# Altium PCB Solar_Wifi.PcbDoc
Units mm, origin at the board's own origin, x right, y up, seen from the top; angles counter-clockwise.
Board outline 128.5 x 66.5 mm, 2 copper layers (Top Layer, Bottm Layer); 44 components, 28 nets, 108 pads, 0 vias.
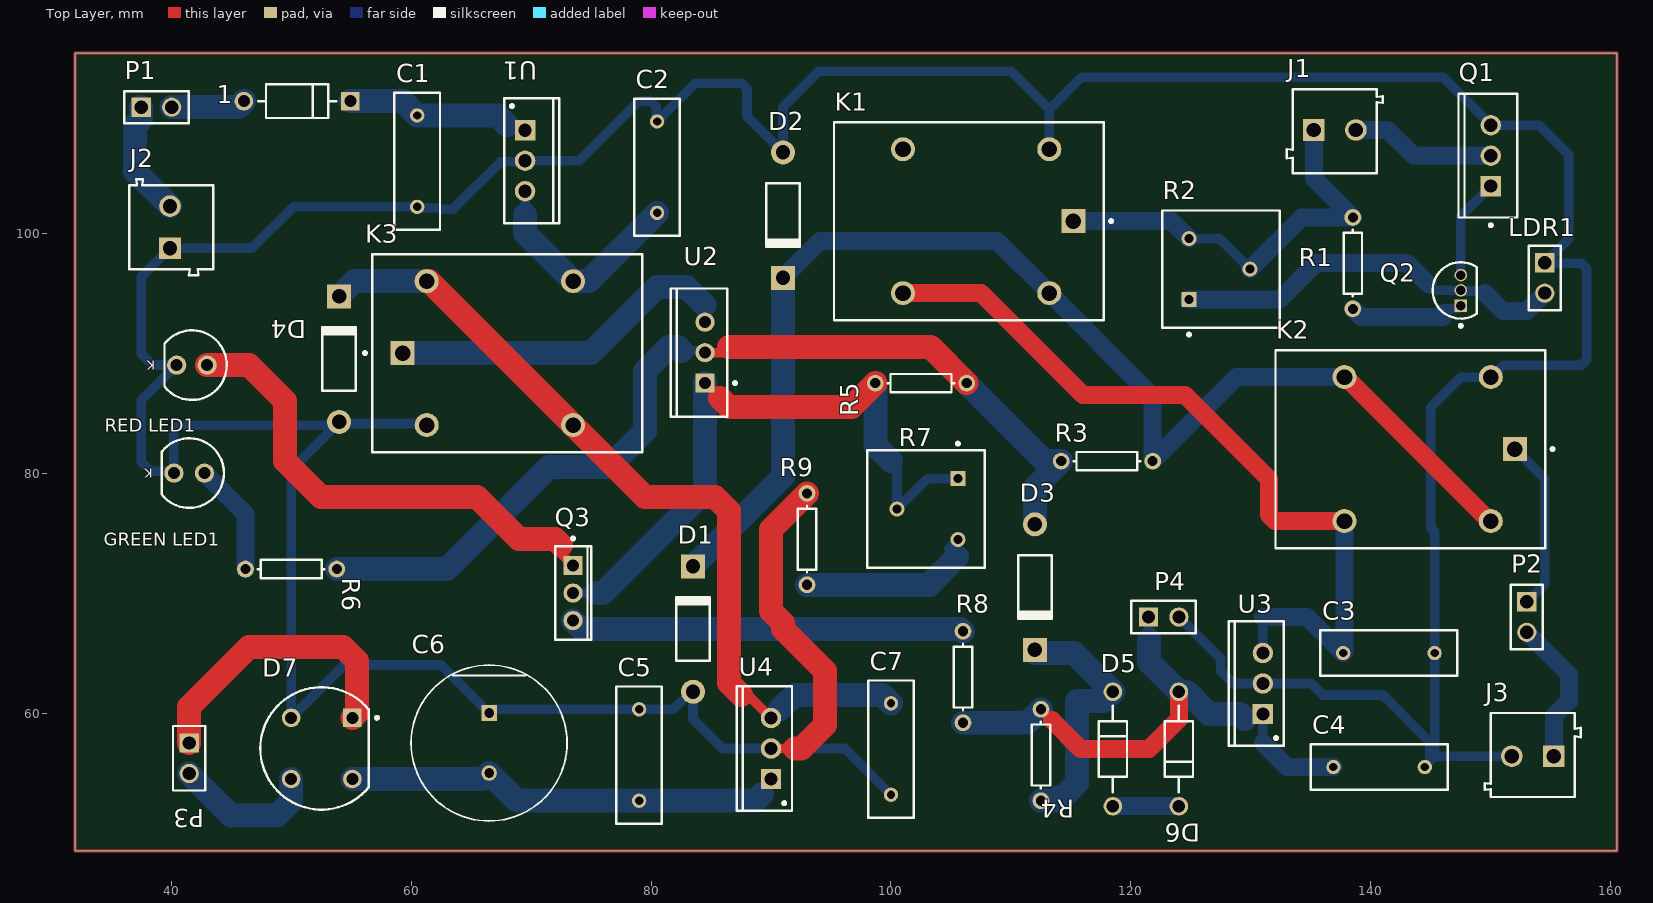
[diagram p0: Top Layer view]
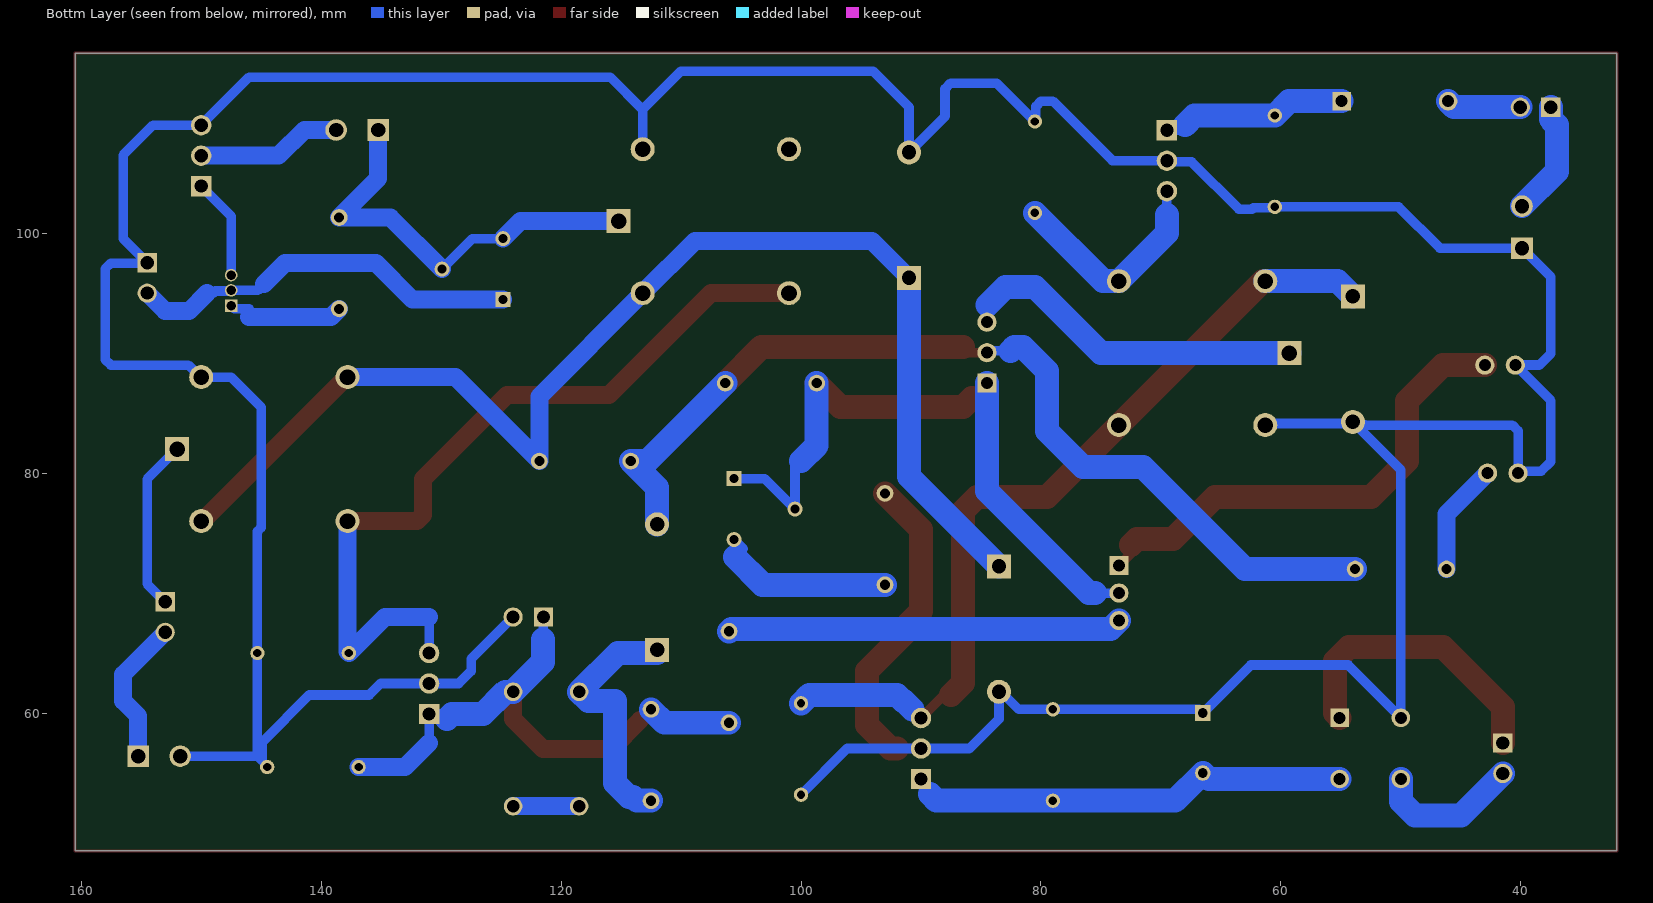
[diagram p1: Bottm Layer view, seen from below]

## Layer stack, top to bottom
Top Solder: solder mask 0.0102, Solder Resist, Dk 3.5
Top Layer: signal copper 0.0356
Dielectric 1: dielectric 0.32, FR-4, Dk 4.8
Bottm Layer: signal copper 0.0356
Bottom Solder: solder mask 0.0102, Solder Resist, Dk 3.5

## Board outline
32,48.5 32,115 160.5,115 160.5,48.5

## Design rules (kind name [scope] priority, off if disabled: settings)
Clearance Clearance_4 [All] p1: gap=0.254 ignorepadtopadclearanceinfootprint=FALSE except(0: Arc-Hole Track-Hole SMDPad-Hole THPad-Hole Via-Hole Fill-Hole Poly-Hole Region-Hole Text-Hole)
Clearance Clearance_3 [All] p2: gap=0.254 ignorepadtopadclearanceinfootprint=FALSE except(0: Arc-Hole Track-Hole SMDPad-Hole THPad-Hole Via-Hole Fill-Hole Poly-Hole Region-Hole Text-Hole)
Clearance Clearance_2 [All] p3: gap=0.254 ignorepadtopadclearanceinfootprint=FALSE except(0: Arc-Hole Track-Hole SMDPad-Hole THPad-Hole Via-Hole Fill-Hole Poly-Hole Region-Hole Text-Hole; 0.75: Arc-Arc Arc-Track Track-Track)
Clearance Clearance_1 [All] p4: gap=0.254 ignorepadtopadclearanceinfootprint=FALSE except(0: Arc-Hole Track-Hole SMDPad-Hole THPad-Hole Via-Hole Fill-Hole Poly-Hole Region-Hole Text-Hole; 0.75: Arc-Arc Arc-Track Track-Track)
Clearance [All] p5: gap=0.254 ignorepadtopadclearanceinfootprint=FALSE except(0: Arc-Hole Track-Hole SMDPad-Hole THPad-Hole Via-Hole Fill-Hole Poly-Hole Region-Hole Text-Hole; 0.75: Arc-Arc Arc-Track Track-Track)
PolygonConnect [All] p1: connectstyle=Relief reliefconductorwidth=0.254 reliefentries=4 polygonreliefangle="90 Angle" airgapwidth=0.254
RoutingVias [All] p1: holewidth=0.711 width=1.27 viastyle="Through Hole" minholewidth=0.711 minwidth=1.27 maxholewidth=0.711 maxwidth=1.27
SolderMaskExpansion [All] p1: expansion=0.102 istentingtop=FALSE
Width [All] p1: maxlimit=2 minlimit=0.8 preferedwidth=1.5 minimp=50.000000 maximp=50.000000 favimp=50.000000
Width Width_1 [All] p2: maxlimit=2 minlimit=0.8 preferedwidth=2 bottomlayer_minwidth=1 minimp=50.000000 maximp=50.000000 favimp=50.000000
30 further rules are at their usual default settings.

## Components (designator, comment, footprint, x,y, rotation, side; value= is the part's Value field where it differs from the comment)
1 "1N4007" FP-1N4007-MFG 50.5,111 r180 top value=15pF
C1 "Cap" RAD-0.3 60.5,106 r90 top value=0.33uf
C2 "Cap" RAD-0.3 80.5,105.5 r270 top value=0.11uf
C3 "Cap" RAD-0.3 141.5,65 r0 top value=0.11uf
C4 "Cap" RAD-0.3 140.69,55.5 r0 top value=0.33uf
C5 "Cap" RAD-0.3 79,56.5 r90 top value=0.33uf
C6 "22000uf" FP-RAD-TH-D_12_5_0_5-L_20-MFG 66.5,57.5 r270 top
C7 "Cap" RAD-0.3 100,57 r90 top value=0.11uf
D1 "Diode 1N4007" DO-41 83.5,67 r90 top
D2 "Diode 1N4007" DO-41 91,101.5 r270 top
D3 "Diode 1N4007" DO-41 112,70.5 r270 top
D4 "Diode 1N4007" DO-41 54,89.5 r90 top
D5 "1N5921BRLG" ONSC-AXIAL_LEAD-2-59-10_P 118.5,57 r270 top
D6 "1N5921BRLG" ONSC-AXIAL_LEAD-2-59-10_P 124,57 r90 top
D7 "Bridge  Rectifier" FP-WOG-MFG 52.04,57.05 r270 top value=20pF
"GREEN LED1" "151051VS04000" "Type 5mm" 41.5,80 r180 top
J1 "LED" 691103110002 137,108.5 r0 top
J2 "solar panel" 691103110002 40,100.5 r90 top
J3 "router" 691103110002 153.5,56.5 r180 top
K1 "G5LE-1-CF DC12" FP-G5LE-1-CF_DC12-MFG 106.5,101 r180 top
K2 "G5LE-1-CF DC12" FP-G5LE-1-CF_DC12-MFG 143.3,82 r180 top
K3 "G5LE-1-CF DC12" FP-G5LE-1-CF_DC12-MFG 68,90 r0 top
LDR1 "" 61300211121 154.5,96.27 r270 top
P1 "switch1" 61300211121 38.77,110.5 r0 top
P2 "switch2" 61300211121 153,68 r270 top
P3 "24v ac" 61300211121 41.5,56.23 r270 top
P4 "battery" 61300211121 122.73,68 r0 top
Q1 "D400" ONSC-TO-220-3-221A-09 150,106.46 r180 top
Q2 "C828" ONSC-TO-92-3-29-11 147.5,95.23 r90 top
Q3 "BD139" ONSC-TO-225-3-77-09 73.5,70 r0 top
R1 "Res1" AXIAL-0.3 138.5,97.5 r90 top value=1K
R2 "200K" FP-3386F-MFG 127.5,97 r90 top value=30kΩ
R3 "Res1" AXIAL-0.3 118,81 r0 top value=7
R4 "Res1" AXIAL-0.3 112.5,56.5 r270 top value=100
R5 "Res1" AXIAL-0.3 102.5,87.5 r0 top value=240
R6 "Res1" AXIAL-0.3 50,72 r0 top value=2.2K
R7 "1K" FP-3386F-MFG 102.925,77 r270 top value=30kΩ
R8 "Res1" AXIAL-0.3 106,63 r90 top value=1K
R9 "Res1" AXIAL-0.3 93,74.5 r270 top value=2.2K
"RED LED1" "151051RS11000" "Type 5mm" 41.73,89 r180 top
U1 "L7824CV" TO220 69.5,106.04 r270 top
U2 "LM317T" NDE0003A 84.5,90.04 r90 top
U3 "L7812CV" TO220 131,62.46 r90 top
U4 "L7824CV" TO220 90,57.04 r90 top

## Footprints (in the part's own frame and the unit in brackets; to place one, negate y for a bottom-side part, rotate by r counter-clockwise, add the part's x,y. Pads: shape width x height; smd on the part's side, far side on the other; paste and mask are expansions set on the pad)
61300211121 [mm] "Pin Header, pitch 2.54 mm, THT, Vertical, single row, 2p"
  rect 1.6x1.6 hole 1.1: 1(-1.27,0)
  round 1.6 hole 1.1: 2(1.27,0)
  silkscreen extent -2.69,-1.35 2.69,1.34, body extent -2.54,-1.27 2.54,1.27, height 8.57
691103110002 [mm] "3,50mm - modular - blue - Horizontal wire entry - Pressure clamp - 8,4mm height - 02p"
  rect 1.8x1.8 hole 1.2: 1(-1.75,0.1)
  round 1.8 hole 1.2: 2(1.75,0.1)
  silkscreen extent -4,-3.5 4,3.5, body extent -4,-3.5 4,3.5, height 8.45
AXIAL-0.3 [mm] "Axial Device, Thru-Hole; 2 Leads; 0.3 in Pin Spacing"
  round 1.4 hole 0.85: 1(-3.81,0) 2(3.81,0)
  silkscreen extent -2.77,-0.76 2.77,0.76
DO-41 [mm] "Diode, Axial; Body 5.2 x 2.7 mm (LxDia. max), Lead Dia. 0.86 mm (max)"
  round 2 hole 1.2: 1(-5.23,0)
  rect 2x2 hole 1.2: 2(5.23,0)
  silkscreen extent -2.65,-1.4 2.75,1.4
FP-1N4007-MFG [mm]
  rect 1.55x1.55 hole 1 paste-1000 mask+0: 1(-4.44,0)
  round 1.55 hole 1 paste-1000 mask+0: 2(4.44,0)
  silkscreen extent -3.26,-1.4 3.26,1.4, body extent -5.32,-1.5 5.32,1.5, height 0.25
FP-3386F-MFG [mm]
  rect 1.25x1.25 hole 0.75 paste-1000 mask+0: 1(-2.54,2.655)
  round 1.25 hole 0.75 paste-1000 mask+0: 2(0,-2.425) 3(2.54,2.655)
  silkscreen extent -5.57,-4.89 4.89,4.89, body extent -4.99,-4.99 4.99,4.99, height 0.25
FP-G5LE-1-CF_DC12-MFG [mm]
  rect 2x2 hole 1.3 paste-1000 mask+0: 1(-8.7,0)
  round 2 hole 1.3 paste-1000 mask+0: 2(-6.7,-6) 3(5.5,-6) 4(5.5,6) 5(-6.7,6)
  silkscreen extent -11.98,-8.25 11.25,8.25, body extent -11.35,-8.35 11.35,8.35, height 0.25
FP-RAD-TH-D_12_5_0_5-L_20-MFG [mm]
  rect 1.3x1.3 hole 0.8 paste-1000 mask+0: 1(-2.5,0)
  round 1.3 hole 0.8 paste-1000 mask+0: 2(2.5,0)
  silkscreen extent -6.5,-6.5 6.5,6.5, body extent -6.6,-6.6 6.6,6.6, height 0.25
FP-WOG-MFG [mm]
  rect 1.55x1.55 hole 1 paste-1000 mask+0: 1(-2.55,3.06)
  round 1.55 hole 1 paste-1000 mask+0: 2(2.55,3.06) 3(-2.55,-2.04) 4(2.55,-2.04)
  silkscreen extent -5.1,-4.61 5.1,5.24, body extent -5.03,-4.52 5.03,4.52, height 0.25
NDE0003A [mm] "FM, 3-Leads, Body 10.7x4.7mm, Pitch 2.54mm"
  rect 1.6x1.6 hole 1: 1(-2.54,0)
  round 1.6 hole 1: 2(0,0) 3(2.54,0)
  silkscreen extent -5.35,-2.63 5.35,2.85, body extent -5.4,-1.9 5.4,2.9, height 19.4
ONSC-AXIAL_LEAD-2-59-10_P [mm] "AXIAL, 2-Leads, Diameter 2.35mm"
  round 1.55 hole 1.05: 1(-4.77,0) 2(4.77,0)
  silkscreen extent -3.6,-1.18 3.59,1.17
ONSC-TO-92-3-29-11 [mm] "TO, 3-Leads, Body Dia 4.7mm, Pitch 1.27mm"
  rect 1.05x1.05 hole 0.8: 1(-1.27,0)
  round 1.05 hole 0.8: 2(0,0) 3(1.27,0)
  silkscreen extent -3.07,-1.34 2.35,2.35, body extent -2.35,-1.33 2.36,2.36, height 7.87
ONSC-TO-220-3-221A-09 [mm] "FM, 3-Leads, Body 10.3x4.85mm, Pitch 2.54mm"
  rect 1.7x1.7 hole 1.1: 1(0,2.54)
  round 1.7 hole 1.1: 2(0,0) 3(0,-2.54)
  silkscreen extent -2.21,-5.15 2.69,5.92, body extent -2.18,-5.15 2.67,5.15, height 19.85
ONSC-TO-225-3-77-09 [mm] "FM, 3-Leads, Body 7.8x3mm, Pitch 2.29mm"
  rect 1.6x1.6 hole 1: 1(0,2.29)
  round 1.6 hole 1: 2(0,0) 3(0,-2.29)
  silkscreen extent -1.49,-3.9 1.51,4.67, body extent -1.49,-3.9 1.51,3.9, height 13.64
RAD-0.3 [mm] "Radial Cap, Thru-Hole; 2 Leads; 0.3 in Pin Spacing"
  round 1.2 hole 0.7: 1(-3.81,0) 2(3.81,0)
  silkscreen extent -5.72,-1.91 5.71,1.9
TO220 [mm] "TO, Thru-Hole, Vertical, Heatsink Mounted; 3 In-Line Leads; Pitch 2.54 mm"
  rect 1.7x1.7 hole 1.1: 1(-2.54,0)
  round 1.7 hole 1.1: 2(0,0) 3(2.54,0)
  silkscreen extent -5.2,-1.75 5.2,2.85, body extent -5.25,-1.8 5.25,2.9, height 19.7
"Type 5mm" [mm] "THT, LED-5mm, 2pin- Body 5.8mm"
  round 1.6 hole 1: 1(1.27,0) 2(-1.27,0)
  silkscreen extent -2.9,-2.9 2.29,2.9, body extent -2.9,-2.9 2.5,2.9, height 11.7

## Part data
1: library part CMP-123542-000001-1, "Rectifier diode 1000 V 1 A DO-41, ,", Capacitance=15pF, Forward Current=1A, Manufacturer=Diotec, Max Junction Temp=+175°C, Max Repetitive Reverse Voltage=1000V, Max Surge Forward Current=27A, Peak Reverse Current=5uA, Temperature="-50°C to +175°C", Temperature Range Low=-50°C, Automotive=No, Category=Diode, ComponentLink2Description=Datasheet, ComponentLink2URL=https://datasheet.octopart.com/1N4007-Diotec-datasheet-62346875.pdf, Device Class L1="Discrete Semiconductors", Device Class L2=Diodes, Device Class L3="Rectifier Diodes", Height=2.8mm, Ipc Land Pattern Name=DIOAD888W100L520D280, Lead Free=Yes, Manufacturer Part Number=1N4007, Octopart=https://octopart.com/1n4007-diotec-4040411, Package=1N4007, Reverse Voltage=1000V, RoHS=TRUE, Temperature Range High=+175°C
C1 C2 C3 C4 C5 C7: "Capacitor", LatestRevisionDate=17-Jul-2002, LatestRevisionNote="Re-released for DXP Platform.", PackageDescription="Radial Cap, Thru-Hole; 2 Leads; 0.3 in Pin Spacing", PackageReference=RAD-0.3, Published=8-Jun-2000, Publisher="Altium Limited"
C6: library part CMP-05427-000620-1, "Aluminum Electrolytic Capacitors (Radial Lead Type) 2200uF ±20% 16V", Capacitance=2.2mF, Case/Package=Radial, Dielectric Material=Aluminium, ESR (Equivalent Series Resistance)=18mR, Max Operating Temperature=105°C, Min Operating Temperature=-40°C, Package Quantity=200, Ripple Current=2.6A, Tolerance=20%, Voltage=16V, Construction=RADIAL, Diameter=12.5mm, Features="General Purpose", Height=20mm, Height - Seated (Max)=0.787inch, Impedance=18mR, Lead Diameter=0.6mm, Lead Free="Lead Free", Lead Pitch=5mm, Lead/Base Style=Straight, Length=20mm, Life (Hours)=10000Hour, Mount="Through Hole", Number of Pins=2, Packaging=Bulk, Radiation Hardening=No, REACH SVHC="No SVHC", Ripple Current (AC)=2.6A, RoHS Compliant=Yes, Series=FR, Termination=Radial, Voltage Rating=16V, Voltage Rating (DC)=16V
D1 D2 D3 D4: "1 Amp General Purpose Rectifier", Code_JEDEC=DO-204-AL, ComponentLink1Description="Manufacturer Link", ComponentLink1URL=http://www.fairchildsemi.com/, ComponentLink2Description=Datasheet, ComponentLink2URL=http://www.fairchildsemi.com/ds/1N%2F1N4001.pdf, DatasheetVersion=1998, LatestRevisionDate=17-Jul-2002, LatestRevisionNote="Re-released for DXP Platform.", PackageDescription="Diode, Axial; Body 5.2 x 2.7 mm (LxDia. max), Lead Dia. 0.86 mm (max)", PackageReference=DO-41, PackageVersion=Aug-1999, Published=8-Jun-2000, Publisher="Altium Limited"
D5 D6: library part CMP-1060-00012-1, "3 W Zener Voltage Regulator, 2-Pin Axial_Lead, Pb-Free, Tape and Reel", Manufacturer="On Semiconductor", ComponentLink1Description="Manufacturer URL", ComponentLink1URL=http://www.onsemi.com/, ComponentLink2Description=Datasheet, ComponentLink2URL=http://www.onsemi.cn/pub_link/Collateral/1N5913B-D.PDF, ComponentLink3Description="Package Specification", ComponentLink3URL=http://www.onsemi.cn/pub_link/Collateral/59-10.PDF, DatasheetVersion="Rev. 5", Mounting Technology="Through Hole", PackageDescription="2-Pin, Axial Lead, Diameter 2.35 mm", PackageReference=AXIAL_LEAD-2-59-10, PackageVersion="Rev. U, 02/2005", Packing="Tape and Reel", PartNumber=1N5921BRLG, RoHS=Pb-Free, VZ Typ (V)=6.8
D7: library part CMP-02540-000015-1, "BRIDGE RECT 1PHASE 1KV 2A WOG", Capacitance=20pF, Forward Current=2A, Manufacturer=Vishay, Manufacturer Part Number=2W10G-E4/51, Max Junction Temp=+150°C, Max Repetitive Reverse Voltage=1000V, Max Surge Forward Current=60A, Package=WOG, Peak Reverse Current=5uA, Temperature="-55°C to +150°C", Temperature Range Low=-55°C, Automotive=No, Category=Diode, ComponentLink2Description=Datasheet, ComponentLink2URL=http://www.vishay.com/docs/88528/2w005g.pdf, Device Class L1="Discrete Semiconductors", Device Class L2=Diodes, Device Class L3="Rectifier Diodes", Digikey Description="BRIDGE RECT 1PHASE 1KV 2A WOG", Height=5.6mm, Lead Free=Yes, Mouser Description="Bridge Rectifiers 2.0 Amp 1000 Volt", Octopart=https://octopart.com/2w10g-e4%2F51-vishay-42173035, Reverse Voltage=1000V, RoHS=TRUE, Temperature Range High=+150°C
"GREEN LED1": library part CMP-1488-00007-1, "THT LED round mono-color color lens, WL-TMRW, Bright Green", Emitting color="Bright Green", Manufacturer="Wuerth Elektronik", ComponentLink1Description="Manufacturer URL", ComponentLink1URL=http://www.we-online.com, ComponentLink2Description=Datasheet, ComponentLink2URL=http://katalog.we-online.de/pbs/datasheet/7448042001.pdfhttp://katalog.we-online.de/pbs/datasheet/7448042001.pdfhttp://katalog.we-online.de/pbs/datasheet/7448042001.pdfhttp://katalog.we-online.de/pbs/datasheet/151051VS04000.pdf, PackageReference="Type 5mm", PartNumber=151051VS04000
J1 J2 J3: library part CMP-1502-03254-1, "Series 1031 - 3.50 mm Horizontal Entry Modular with Pressure Clamp WR-TBL, 2 pin", Manufacturer="Wurth Elektronik", Operating Temperature=-40to105degC, Package Reference=691103110002, Datasheet URL=http://katalog.we-online.de/em/datasheet/6911031100xx.pdf, Manufacturer URL=http://www.we-online.de, Mounting Technology=THT, Packaging=Box, Part Number=691103110002, Pin Number=2, Pitch=3.50mm, Publisher=WurthElektronik
K1 K2 K3: library part CMP-08822-000138-1, "RELAY GEN PURPOSE SPDT 10A 12V", Coil Current=33.3mA, Coil Power=400mW, Coil Resistance=360R, Coil Voltage (DC)=12V, Contact Current Rating=10A, Max Operating Temperature=85°C, Max Voltage Rating (AC)=250V, Max Voltage Rating (DC)=125V, Min Operating Temperature=-25°C, Package Quantity=100, Coil Type=Non-Latching, Contact Material=Tin, Depth=16.5mm, Length=22.5mm, Max Current Rating=10A, Mount="Through Hole", Number of Pins=5, Operate Time=10ms, Packaging=Tray, Radiation Hardening=No, Relay Type="General Purpose", Release Time=5ms, Series=G5LE, Termination=Solder, Throw Configuration=SPDT, Voltage Rating (AC)=250V, Weight=12g
LDR1 P1 P2 P3 P4: library part CMP-1712-00002-4, "THT Vertical Pin Header WR-PHD, Pitch 2.54 mm, Single Row, 2 pins", Contact Resistance=20mOhm, Manufacturer="Wurth Elektronik", Operating Temperature=-40to105degC, Package Reference=61300211121, Rated Current=3A, Withstanding Voltage=500VAC, Working Voltage=250VAC, Datasheet URL=https://katalog.we-online.de/em/datasheet/6130xx11121.pdf, Gender=Male, Manufacturer URL=http://www.we-online.de, Mounting Technology=THT, Orientation=Vertical, Packaging=Bag, Part Number=61300211121, Pin Number=2, Pitch=2.54mm, Publisher=WurthElektronik, Row Number=Single
Q1: library part CMP-1048-01112-1, "Complementary Silicon Plastic Power Transistor, 3-Pin TO-220, Pb-Free, Tube", Manufacturer="On Semiconductor", PartNumber=BD241CG, ComponentLink1Description="Manufacturer URL", ComponentLink1URL=http://www.onsemi.com/, ComponentLink2Description=Datasheet, ComponentLink2URL=http://www.onsemi.com/pub_link/Collateral/BD241C-D.PDF, ComponentLink3Description="Package Specification", ComponentLink3URL=http://www.onsemi.com/pub_link/Collateral/221A-09.PDF, DatasheetVersion="Rev. 9", fT Min (MHz)=3, IC Continuous (A)=3, Mounting Technology="Through Hole", PackageDescription="3-Pin Flange Mount, Vertical Straight Lead, Body 9.97 x 4.445 mm, Pitch 2.54 mm", PackageReference=TO-220-3-221A-09, PackageVersion="Rev. AG, 09/2011", Packing=Tube, Polarity=NPN, RoHS=TRUE
Q2: library part CMP-1048-01467-1, "Amplifier Transistor, NPN Silicon, 3-Pin TO-92, Bulk Box", Manufacturer="On Semiconductor", PartNumber=BC547B, ComponentLink1Description="Manufacturer URL", ComponentLink1URL=http://www.onsemi.com/, ComponentLink2Description=Datasheet, ComponentLink2URL=http://www.onsemi.com/pub_link/Collateral/BC546-D.PDF, ComponentLink3Description="Package Specification", ComponentLink3URL=http://www.onsemi.cn/pub_link/Collateral/2N6426-D.PDF, DatasheetVersion="Rev. 7", fT Min (MHz)=150, IC Continuous (A)=0.1, Mounting Technology="Through Hole", PackageDescription="3-Pin Transistor Outline, Body 4.825 x 3.685 mm, Pitch 1.27 mm", PackageReference=TO-92-3-29-11_AM_SL, PackageVersion="Rev. AM", Packing="Bulk Box", Polarity=NPN, RoHS=FALSE
Q3: library part CMP-1048-01271-1, "Plastic Medium-Power Silicon NPN Transistor, 3-Pin TO-225, Bulk Box", Manufacturer="On Semiconductor", ComponentLink1Description="Manufacturer URL", ComponentLink1URL=http://www.onsemi.com/, ComponentLink2Description=Datasheet, ComponentLink2URL=http://www.onsemi.com/pub_link/Collateral/BD135-D.PDF, ComponentLink3Description="Package Specification", ComponentLink3URL=http://www.onsemi.com/pub_link/Collateral/77-09.PDF, DatasheetVersion="Rev. 16", IC Continuous (A)=1.5, Mounting Technology="Through Hole", PackageDescription="3-Pin Flange Mount, Vertical Straight Lead, Body 7.6 x 2.7 mm, Pitch 2.29 mm", PackageReference=TO-225-3-77-09, PackageVersion="Rev. AC, 12/2013", Packing="Bulk Box", PartNumber=BD139, Polarity=NPN, RoHS=FALSE
R1 R3 R4 R5 R6 R8 R9: "Resistor", LatestRevisionDate=17-Jul-2002, LatestRevisionNote="Re-released for DXP Platform.", PackageDescription="Axial Device, Thru-Hole; 2 Leads; 0.3 in Pin Spacing", PackageReference=AXIAL-0.3, Published=8-Jun-2000, Publisher="Altium Limited"
R2 R7: library part CMP-07234-000018-1, "TRIMMER 30K OHM 0.5W PC PIN TOP", Manufacturer=Bourns, Manufacturer Part Number=3386F-1-303LF, Package=3386F, Power Rating=0.5W, Resistance=30kΩ, Temperature="-55°C to +125°C", Temperature Coefficient=100ppm/°C, Temperature Range High=+125°C, Temperature Range Low=-55°C, Tolerance=10%, Voltage Rating=300V, Automotive=No, Category=Res, ComponentLink2Description=Datasheet, ComponentLink2URL=https://www.bourns.com/docs/Product-Datasheets/3386.pdf, Composition=Cermet, Device Class L1="Passive Components", Device Class L2=Resistors, Device Class L3="Variable Resistors and Potentiometers", Digikey Description="TRIMMER 30K OHM 0.5W PC PIN TOP", Height=5.08mm, Lead Free=Yes, Mouser Description="Trimmer Resistors - Through Hole 3/8 30Kohms 10% 0.5Watts Square", Octopart=https://octopart.com/3386f-1-303lf-bourns-1032328, RoHS=TRUE, Series=3386, Standoff Height=0.38mm
"RED LED1": library part CMP-1488-00008-1, "THT LED round mono-color color lens, WL-TMRW, Red", Emitting color=Red, Manufacturer="Wuerth Elektronik", ComponentLink1Description="Manufacturer URL", ComponentLink1URL=http://www.we-online.com, ComponentLink2Description=Datasheet, ComponentLink2URL=http://katalog.we-online.de/pbs/datasheet/7448042001.pdfhttp://katalog.we-online.de/pbs/datasheet/7448042001.pdfhttp://katalog.we-online.de/pbs/datasheet/7448042001.pdfhttp://katalog.we-online.de/pbs/datasheet/151051RS11000.pdf, PackageReference="Type 5mm", PartNumber=151051RS11000
U1 U4: library part CMP-0244-00424-1, "Positive Voltage Regulator, 24V, 3-Pin TO-220", ComponentLink1Description="Manufacturer URL", ComponentLink1URL=http://www.st.com, ComponentLink2Description=Datasheet, ComponentLink2URL=http://www.st.com/internet/com/TECHNICAL_RESOURCES/TECHNICAL_LITERATURE/DATASHEET/CD00000444.pdf, ComponentLink3Description="Package Specification", ComponentLink3URL=http://www.st.com/internet/com/TECHNICAL_RESOURCES/TECHNICAL_LITERATURE/PACKAGE_INFORMATION/CD00004649.pdf, DatasheetVersion=16/11/2011, PackageDescription="TO, Thru-Hole, Vertical, Heatsink Mounted; 3 In-Line Leads; Pitch 2.54 mm", PackageReference=TO220, PackageVersion=ver3.0
U2: library part CMP-0062-02456-3, "3-Terminal Adjustable Regulator, 3-pin TO-220", Manufacturer="Texas Instruments", PackageTopMarking="NSUZXYTTE#*LM317T P+", PowerWise=N, ComponentLink1Description="Datasheet URL", ComponentLink1URL=http://www.ti.com/general/docs/lit/getliterature.tsp?genericPartNumber=LM317-N&fileType=pdf, CompType="LDO IC", PackageDescription="TO-220, Molded, 3 Lead, Straight", PackageReference=NDE0003A, PinCount=3, RoHS=N
U3: library part CMP-0244-00450-1, "Positive Voltage Regulator, 12V, 3-Pin TO-220", ComponentLink1Description="Manufacturer URL", ComponentLink1URL=http://www.st.com, ComponentLink2Description=Datasheet, ComponentLink2URL=http://www.st.com/internet/com/TECHNICAL_RESOURCES/TECHNICAL_LITERATURE/DATASHEET/CD00000444.pdf, ComponentLink3Description="Package Specification", ComponentLink3URL=http://www.st.com/internet/com/TECHNICAL_RESOURCES/TECHNICAL_LITERATURE/PACKAGE_INFORMATION/CD00004649.pdf, DatasheetVersion=16/11/2011, PackageDescription="TO, Thru-Hole, Vertical, Heatsink Mounted; 3 In-Line Leads; Pitch 2.54 mm", PackageReference=TO220, PackageVersion=ver3.0

## Nets (pads, with @x,y where several pads share a name; then routed paths per layer and width w, separated by ;. In a path a pad name is that pad's centre, name@x,y a point inside that pad or via, vN(x,y) a via of type N, cw(c..) or ccw(c..) an arc to the next point about the centre after c; other vN are vias at no path point)
GND: "GREEN LED1.1" "RED LED1.1" C1.1 C2.1 C3.2 C4.2 C5.2 C6.1 C7.1 D1.1 D2.1 D4.1 D7.3 J2.1 J3.2 K1.2 K2.2 K3.2 LDR1.1 P4.2 Q1.3 R9.1 U1.2 U3.2 U4.2 | length 404.8
  Top Layer w0.8: U4.2 92,57.04
  Top Layer w2: 92,57.04 92.54,57.04 94.5,59 94.5,63.5 91,67 91,67.5 90,68.5 90,75.31 R9.1
  Bottm Layer w0.8: K3.2 61.165,84.135 54.135,84.135 54,84 D4.1 ; C7.1 96.15,57.04 U4.2 85.96,57.04 83.5,59.5 D1.1 83.309,61.77 81.849,60.31 C5.2 66.81,60.31 C6.1 62.5,64 54.4,64 D7.3 50,80.27 D4.1 ; K1.2 113.2,110.3 ; P4.2 127.5,64.5 127.5,63.5 128.54,62.46 U3.2 135.04,62.46 136,61.5 141,61.5 144.905,57.595 144.905,56.013 145.31,56.418 C3.2 145.31,75.149 145,75.459 145,85.5 147.5,88 K2.2 150.069,88 151.069,89 157.531,89 158,89.469 158,97.031 157.531,97.5 LDR1.1@154.5,97.5 ; 145.508,56.4 J3.2 ; LDR1.1 156.5,99.54 156.5,106.5 154,109 Q1.3 146,113 115.9,113 113.2,110.3 ; D4.1 53.77,84.04 52.972,84.04 52.931,84 40.699,84 40.23,83.531 40.23,80 40.077,80.153 38.316,80.153 37.5,80.969 37.5,86.04 40.46,89 40.451,89.009 38.46,89.009 37.5,89.969 37.5,96.35 J2.1 46.75,98.75 50.19,102.19 C1.1 60.577,102.113 62.285,102.113 62.398,102 63.5,102 67.45,105.95 69.41,105.95 U1.2 74.04,106.04 79,111 80,111 80.423,110.577 80.423,109.387 C2.1 83.69,112.5 87.531,112.5 88,112.031 88,109.73 D2.1 91,110.5 94,113.5 110,113.5 113.2,110.3
Net1_1: 1.1 C1.2 U1.1 | length 15.4
  Bottm Layer w0.8: 68,108.58 U1.1
  Bottm Layer w2: 1.1 59.31,111 C1.2 67.19,109.81 68,109
Net1_2: 1.2 P1.2 | length 6.2
  Bottm Layer w2: P1.2 45.56,110.5 1.2
NetC2_2: C2.2 K3.4 U1.3 | length 18.5
  Bottm Layer w0.8: 69.5,101.5 U1.3
  Bottm Layer w2: 69.5,101.5 69.5,100 K3.4 74.81,96 C2.2
NetC3_1: C3.1 K1.4 K2.4 U3.3 | length 68.4
  Top Layer w1.5: K1.4 107.5,95 116,86.5 124.5,86.5 131.5,79.5 131.5,76.5 132,76 K2.4
  Bottm Layer w0.8: U3.3 131,68
  Bottm Layer w1.5: 131,68 134.69,68 C3.1 137.8,65.11 K2.4
NetC4_1: C4.1 D6.2 P4.1 R4.1 R8.1 U3.1 | length 47.5
  Top Layer w0.8: R4.1 113.405,59.405
  Top Layer w1.5: 113.405,59.405 115.81,57 121.5,57 124,59.5 D6.2
  Bottm Layer w0.8: P4.1 121.5,67.96 121.5,66.115 ; 129.5,59.92 U3.1 131,57.5
  Bottm Layer w1.5: 131,57.5 133,55.5 C4.1
  Bottm Layer w2: R8.1 111.38,59.19 R4.1 ; 121.5,66.115 121.5,64.27 D6.2 124.65,61.77 126.5,59.92 129.08,59.92 129.5,59.5
NetC5_1: C5.1 C6.2 D7.2 U4.1 | length 37.1
  Bottm Layer w0.8: 89.25,53.25 90,54 U4.1
  Bottm Layer w2: D7.2 66,54.5 C6.2 68.81,52.69 C5.1 88.69,52.69 89.25,53.25
NetC7_2: C7.2 D4.2 K3.3 K3.5 U4.3 | length 70.9
  Top Layer w0.8: 87.79,61.79 U4.3
  Top Layer w2: K3.5 61.5,96 K3.3 79.5,78 85.328,78 86.5,76.828 86.5,62.5 87.5,61.5
  Bottm Layer w0.8: U4.3 90.71,60.29
  Bottm Layer w2: D4.2 55.27,96 K3.5 ; 90.71,60.29 91.42,61 91.5,61 92,61.5 99.31,61.5 C7.2
NetD1_2: D1.2 D2.2 K1.5 K2.3 K2.5 R3.2 | length 106.3
  Top Layer w1.5: K2.3 137.9,88 149.9,76 K2.5
  Bottm Layer w0.8: K2.3 K2.3@138,88
  Bottm Layer w1.5: D2.2 94.08,99.35 108.85,99.35 K1.5 121.81,86.39 R3.2 128.81,88 K2.3
  Bottm Layer w2: D1.2 91,79.73 D2.2
NetD3_1: D3.1 R3.1 R5.2 R6.2 U2.2 | length 81.3
  Top Layer w0.8: U2.2 86.5,90.04
  Top Layer w2: 86.5,90.5 103.31,90.5 R5.2
  Bottm Layer w0.8: 82.53,90.193 84.347,90.193 U2.2
  Bottm Layer w2: R6.2 63,72 71.5,80.5 76.5,80.5 79.5,83.5 79.5,88.5 81.5,90.5 82.224,90.5 82.53,90.193 ; R5.2 112.81,81 R3.1 112,78.81 D3.1
NetD3_2: D3.2 D5.1 R4.2 | length 21.9
  Bottm Layer w2: D3.2 112,65 115.27,65 D5.1 117.73,61 115.5,61 115.5,54.172 114.328,53 114,53 113.69,52.69 R4.2
NetD5_2: D5.2 D6.1 | length 5.5
  Bottm Layer w1.5: D5.2 D6.1
NetD7_1: D7.1 P3.1 | length 24.5
  Top Layer w2: P3.1 41.5,60.5 46.5,65.5 54.328,65.5 55.5,64.328 55.5,60 D7.1
NetD7_4: D7.4 P3.2 | length 12.3
  Bottm Layer w2: P3.2 45,51.46 48.828,51.46 50,52.632 D7.4
"NetGREEN LED1_2": "GREEN LED1.2" R6.1 | length 9.4
  Bottm Layer w1.5: 42.77,80 46.19,76.58 R6.1
NetJ1_1: J1.1 K1.1 R1.2 R2.2 R2.3 | length 35.4
  Bottm Layer w0.8: R2.3 127.385,99.54 R2.2
  Bottm Layer w1.5: K1.1 123.385,101 R2.3 ; R2.2 134.235,101.31 R1.2 135.25,104.56 J1.1
NetJ1_2: J1.2 Q1.2 | length 12.1
  Bottm Layer w1.5: J1.2 141.4,108.6 143.54,106.46 Q1.2
NetJ2_2: J2.2 P1.1 | length 9.7
  Bottm Layer w2: P1.1 37.5,109.5 37,109 37,105.15 J2.2
NetJ3_1: J3.1 P2.2 | length 12.3
  Bottm Layer w1.5: P2.2 156.5,63.23 156.5,61 155.25,59.75 J3.1
NetK2_1: K2.1 P2.1 | length 14.4
  Bottm Layer w0.8: K2.1 154.5,79.5 154.5,70.77 P2.1
NetK3_1: K3.1 U2.3 | length 29.5
  Bottm Layer w0.8: 84.451,94 84.451,92.629 U2.3
  Bottm Layer w2: K3.1 75,90 80.5,95.5 82.951,95.5 84.451,94
NetLDR1_2: LDR1.2 Q2.2 R2.1 | length 33.2
  Bottm Layer w0.8: 144.75,95.75 145.27,95.23 Q2.2 147.548,95.182 148.818,95.182 149,95 149.5,95
  Bottm Layer w1.5: R2.1 132.403,94.46 135.443,97.5 143,97.5 144.75,95.75 ; 149.5,95 151,93.5 153,93.5 LDR1.2
NetQ1_1: Q1.1 Q2.3 | length 8.5
  Bottm Layer w0.8: Q2.3 147.5,101.42 Q1.1
NetQ2_1: Q2.1 R1.1 | length 9.4
  Bottm Layer w0.8: 146,93.69 147.23,93.69 Q2.1
  Bottm Layer w1.5: R1.1 139.19,93 146,93
NetQ3_1: "RED LED1.2" Q3.1 | length 40.6
  Top Layer w0.8: 72.145,73.645 Q3.1
  Top Layer w2: 43,89 46.5,89 49.5,86 49.5,81 52.5,78 65.5,78 69,74.5 72,74.5 72.5,74
NetQ3_2: Q3.2 R5.1 R7.1 R7.2 U2.1 | length 56.8
  Top Layer w0.8: U2.1 85.75,86.25
  Top Layer w2: 85.75,86.25 86.5,85.5 96.713,85.5 98.713,87.5 R5.1
  Bottm Layer w0.8: Q3.2 75.5,70 ; 100,81 100.5,80.5 R7.2 103.04,79.54 R7.1
  Bottm Layer w2: 75.5,70 76,70 84.5,78.5 U2.1 ; R5.1 98.69,82.31 100,81
NetQ3_3: Q3.3 R8.2 | length 32.9
  Bottm Layer w2: Q3.3 74.21,67 105.81,67 R8.2
NetR7_3: R7.3 R9.2 | length 14.5
  Bottm Layer w0.8: 104.81,73.69 R7.3
  Bottm Layer w2: R9.2 103.19,70.69 105.5,73
pads on no net: K1.3
copper on no net: | length 390
  Top Layer w0.254: 32,48.5 160.5,48.5 160.5,115 32,115 32,48.5

## Text inside footprints (layer, text, board x,y; h text height)
"GREEN LED1": Top Overlay "K" at 38.452,80.381 h0.76 r180; Top Courtyard "K" at 38.452,80.381 h0.76 r180
"RED LED1": Top Overlay "K" at 38.682,89.381 h0.76 r180; Top Courtyard "K" at 38.682,89.381 h0.76 r180